# Altium PCB bai 2.PcbDoc
Units mil, origin at the board's own origin, x right, y up, seen from the top; angles counter-clockwise.
Board outline 4985 x 2990 mil, 2 copper layers (Top Layer, Bottom Layer); 15 components, 9 nets, 34 pads, 0 vias.
Unrouted connection lines stored in the file: 1.
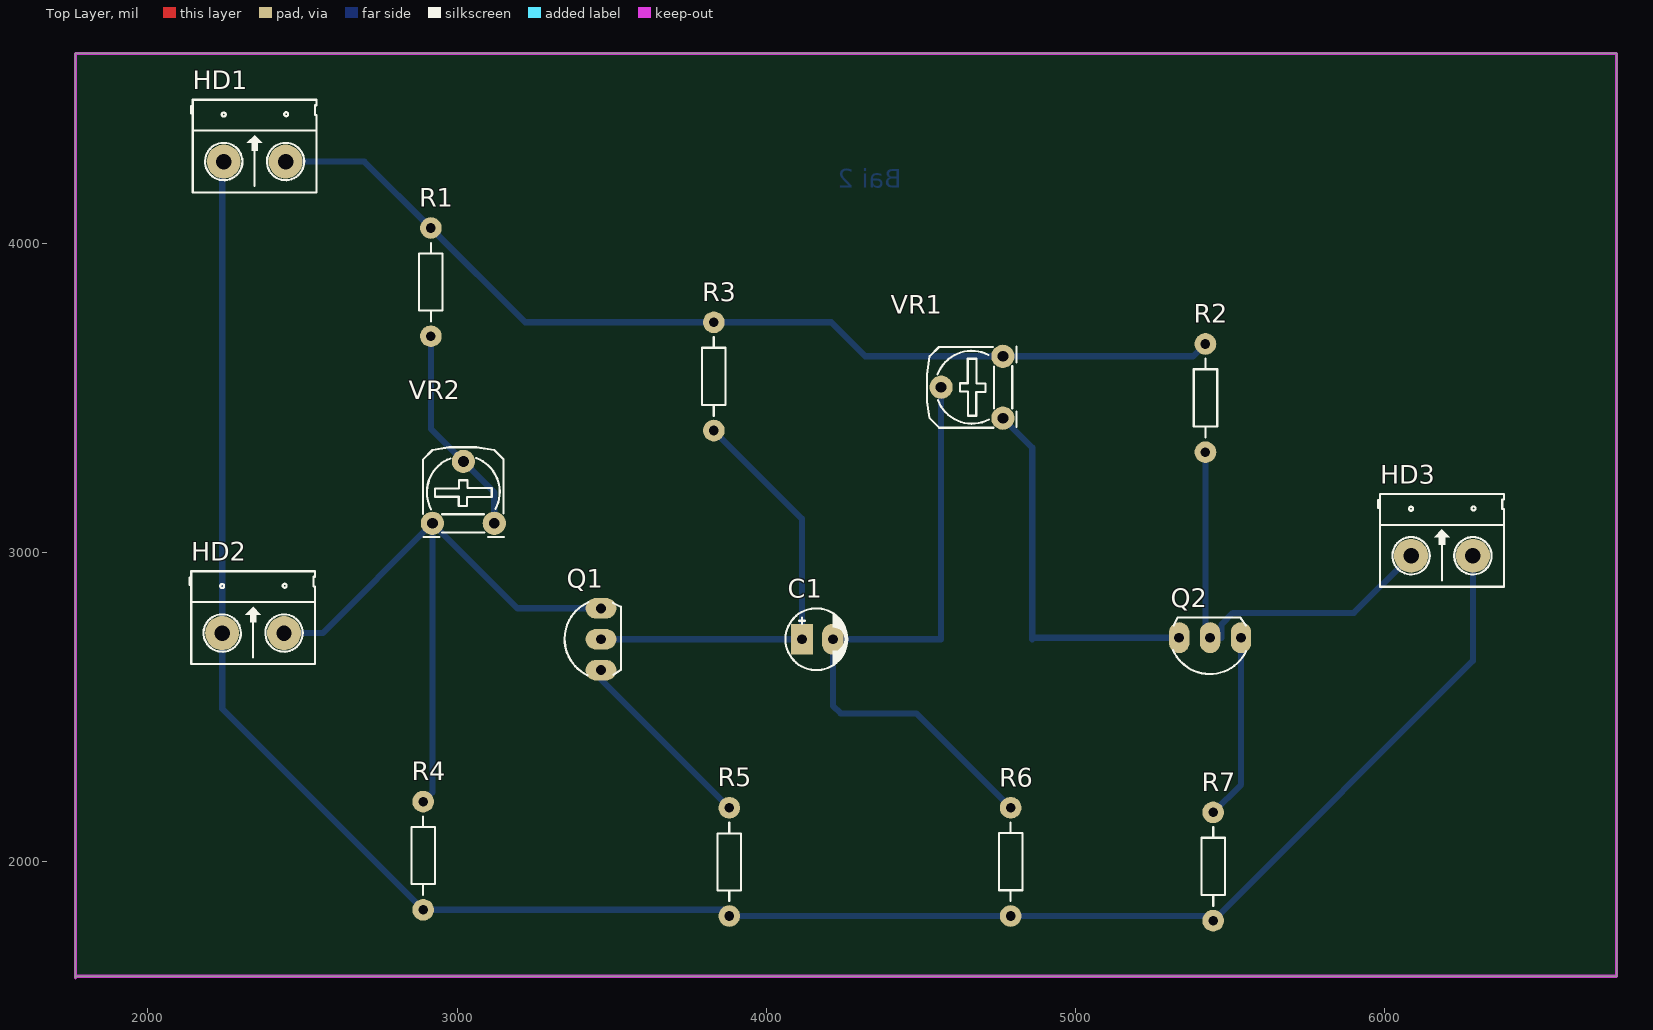
[diagram p0: Top Layer view]
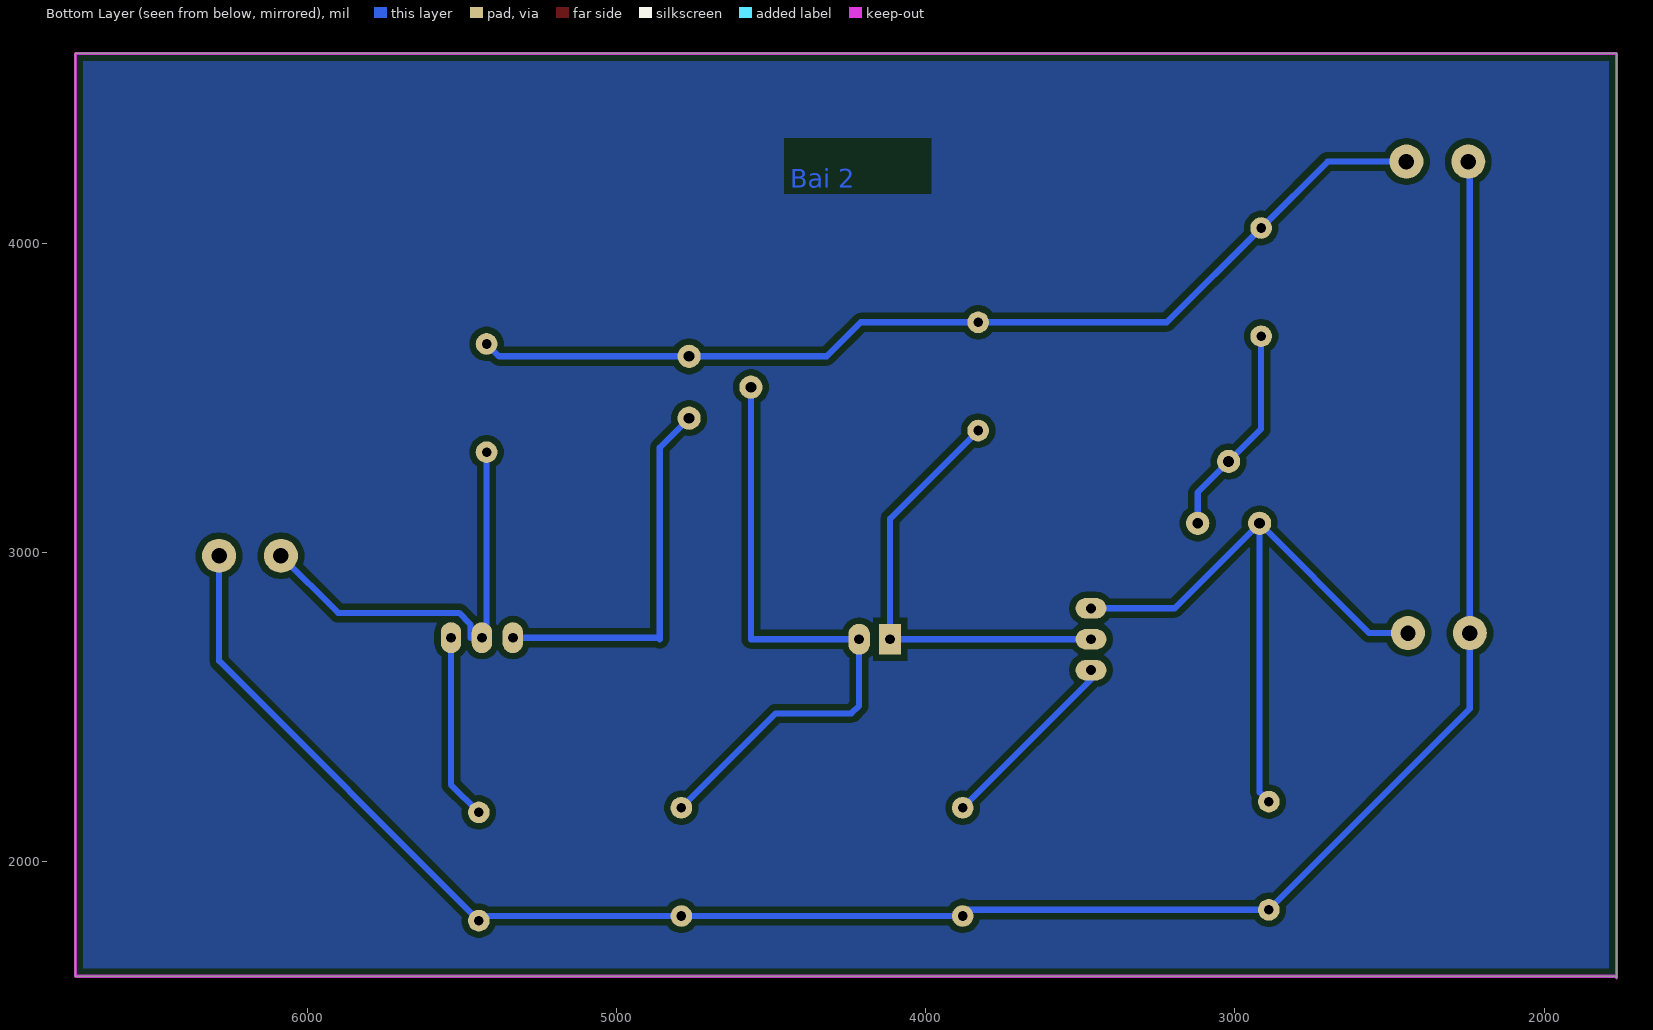
[diagram p1: Bottom Layer view, seen from below]
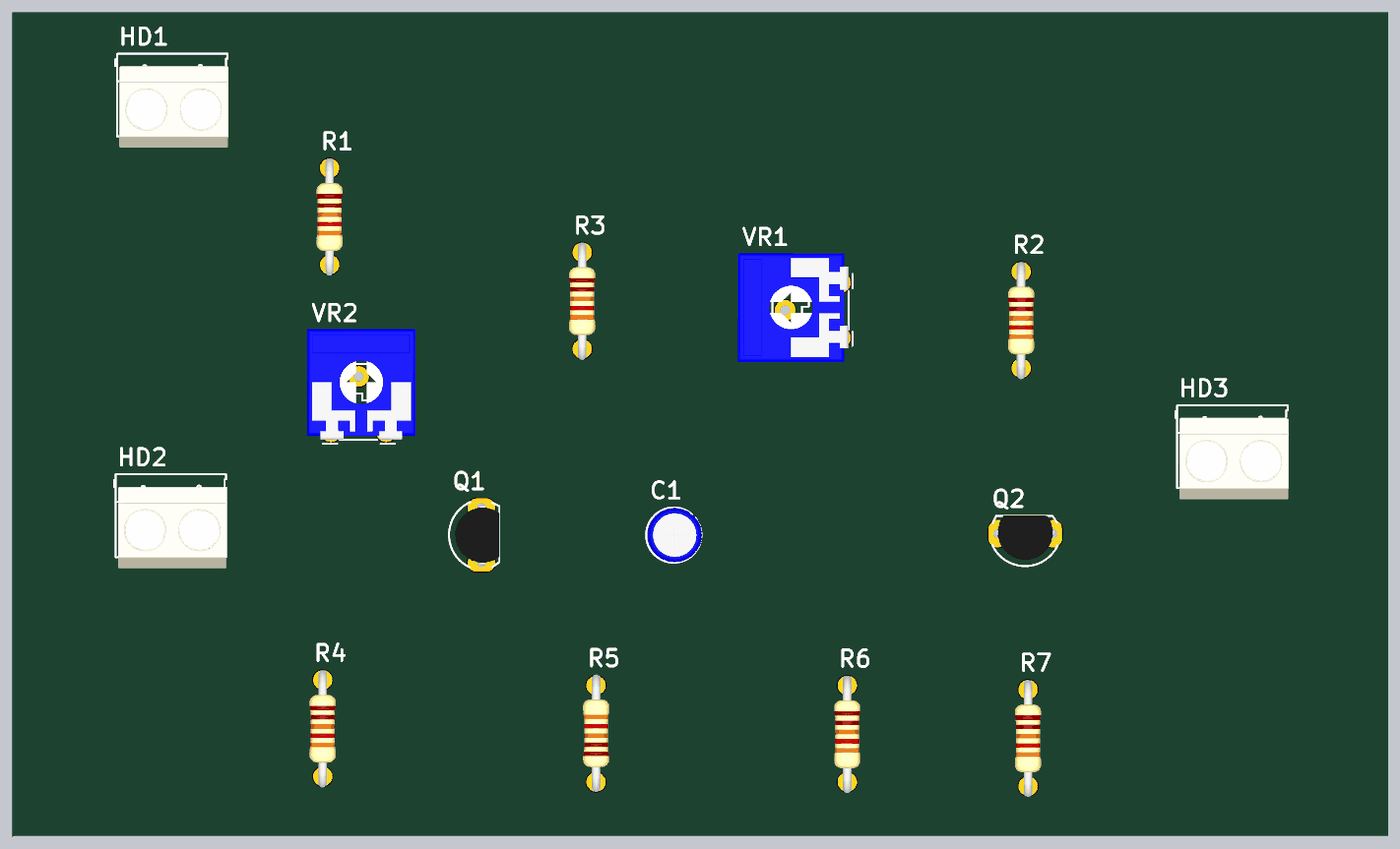
[diagram p2: 3D render of the assembled board from above, using the file's embedded part models]

## Layer stack, top to bottom
Top Solder: solder mask 0.4, Solder Resist, Dk 3.5
Top Layer: signal copper 1.4
Dielectric 1: dielectric 12.6, FR-4, Dk 4.8
Bottom Layer: signal copper 1.4
Bottom Solder: solder mask 0.4, Solder Resist, Dk 3.5

## Board outline
1765,1625 1770,1630 6750,1630 6750,4615 1765,4615

## Design rules (kind name [scope] priority, off if disabled: settings)
Clearance [All] p1: gap=20 ignorepadtopadclearanceinfootprint=FALSE
PolygonConnect [All] p1: connectstyle=Relief reliefconductorwidth=10 reliefentries=4 polygonreliefangle="90 Angle" airgapwidth=10
RoomDefinition "bai 2" [InComponentClass('bai 2')] p1: confinementstyle=ConfineIn formatcopy=TRUE lockcomponents=FALSE outline 7045,980 11360,980 11360,2800 7045,2800
RoutingLayers [All] p1: top layer_v5=FALSE bottom layer_v5=TRUE
RoutingVias [All] p1: holewidth=28 width=50 viastyle="Through Hole" minholewidth=28 minwidth=50 maxholewidth=28 maxwidth=50
SolderMaskExpansion [All] p1: expansion=4 istentingtop=FALSE
Width [All] p1: maxlimit=30 minlimit=15 preferedwidth=20
29 further rules are at their usual default settings.

## Components (designator, comment, footprint, x,y, rotation, side; value= is the part's Value field where it differs from the comment)
C1 "10uF" CP1/2 4115,2720 r0 top value=10uF/50V
HD1 "Header 2" HED2 2245,4265 r0 top
HD2 "Header 2" HED2 2240,2740 r0 top
HD3 "Header 2" HED2 6085,2990 r0 top
Q1 "C1815" QTO-92 3465,2720 r90 top
Q2 "C1815" QTO-92 5435,2725 r180 top
R1 "1k" R1/4W 2915,3700 r90 top value="R1/4W - 1K"
R2 "1k" R1/4W 5420,3325 r90 top value="R1/4W - 1K"
R3 "1k" R1/4W 3830,3395 r90 top value="R1/4W - 1K"
R4 "1k" R1/4W 2890,1845 r90 top value="R1/4W - 1K"
R5 "1k" R1/4W 3880,2175 r270 top value="R1/4W - 1K"
R6 "1k" R1/4W 4790,1825 r90 top value="R1/4W - 1K"
R7 "1k" R1/4W 5445,1810 r90 top value="R1/4W - 1K"
VR1 "10K" VR 4765,3435 r90 top value="VR 10K"
VR2 "10K" VR 2920,3095 r0 top value="VR 10K"

## Footprints (in the part's own frame and the unit in brackets; to place one, negate y for a bottom-side part, rotate by r counter-clockwise, add the part's x,y. Pads: shape width x height; smd on the part's side, far side on the other; paste and mask are expansions set on the pad)
CP1/2 [mil] "Tu hoa < 22uF/16>50V"
  rect 70x100 hole 32: 1(0,0)
  oval 70x100 hole 32: 2(100,0)
  silkscreen extent -53,-100 147,100, body extent -49,-99 149,99, height 287
HED2 [mil] "Header 2, 2 pin, hight 300mil, Pin to Pin 200, Colour Green"
  round 110 hole 50: 1(0,0) 2(200,0)
  silkscreen extent -106,-100 300,200, body extent -92,-140 302,155, height 394
QTO-92 [mil] "TO-92"
  oval 66x100 hole 32: 1(-100,0) 2(0,0) 3(100,0)
  silkscreen extent -117,-65 120,118, body extent -109,-66 109,95, height 245
R1/4W [mil] "R 1/4W, 2 Pin, 350mil"
  round 70 hole 31: 1(0,0) 2(350,0)
  silkscreen extent 48,-38 302,38, body extent -40,-47 386,47, height 111
VR [mil] "Resistor Variable"
  round 75 hole 35: 1(0,0) 2(100,200) 3(200,0)
  silkscreen extent -31,-44 231,246, body extent -87,-30 307,372, height 165

## Part data
C1: library part CP1, "Cap P  0,1uF < 22uF , 16 - 50V", Description 1="10 => 220uF/6,3V/10V - 10uF => 100uF/16V", Description 2="0,1uF => 33uF/50V - 10uF => 22uF/63V", Description 3="0,47uF => 10uF/100V"
HD1 HD2 HD3: library part Hed2, "Header 2 (Green)"
Q1 Q2: "NPN 600mW, ECB", =C2383
R1 R2 R3 R4 R5 R6 R7: library part R1/4W, "Resistor 1/4W"
VR1 VR2: library part VR1, "Var Resistor"

## Nets (pads, with @x,y where several pads share a name; then routed paths per layer and width w, separated by ;. In a path a pad name is that pad's centre, name@x,y a point inside that pad or via, vN(x,y) a via of type N, cw(c..) or ccw(c..) an arc to the next point about the centre after c; other vN are vias at no path point)
+12: HD1.2 R1.2 R2.2 R3.2 VR1.3 | length 3252.5
  Bottom Layer w20: HD1.2 2700,4265 R1.2 3220,3745 R3.2 4210,3745 4320,3635 VR1.3 5380,3635 R2.2
GND: HD1.1 HD2.1 HD3.2 R4.1 R5.2 R6.1 R7.1 | length 6788.7
  Bottom Layer w20: HD1.1 2240,4260 HD2.1 2240,2495 R4.1 3860,1845 R5.2 R6.1 5430,1825 R7.1 6285,2650 HD3.2
NetC1_1: C1.1 Q1.2 R3.1 | length 1443.1
  Bottom Layer w20: Q1.2 C1.1 4115,3110 R3.1
NetC1_2: C1.2 Q2.3 R6.2 VR1.1 VR1.2 | length 3323.1
  Bottom Layer w20: VR1.2 4565,2720 C1.2 4215,2505 4240,2480 4485,2480 R6.2 ; VR1.1 4860,3340 4860,2720 4865,2725 Q2.3
NetHD2_2: HD2.2 Q1.3 R4.2 VR2.1 | length 2198.4
  Bottom Layer w20: HD2.2 2565,2740 VR2.1 ; R4.2 2920,2225 VR2.1 ; Q1.3 3195,2820 VR2.1
NetHD3_1: HD3.1 Q2.2 R2.1 | length 1391.2
  Bottom Layer w20: R2.1 5420,2740 Q2.2 5472,2725 5472,2768.1 5508.9,2805 5900,2805 HD3.1
NetQ1_1: Q1.1 R5.1 | length 616.9
  Bottom Layer w20: Q1.1 3465,2590 R5.1
NetQ2_1: Q2.1 R7.2 | length 602.3
  Bottom Layer w20: R7.2 5535,2250 Q2.1
NetR1_1: R1.1 VR2.2 VR2.3 | length 689.9
  Bottom Layer w20: R1.1 2915,3400 VR2.2 3120,3195 VR2.3

## Polygon pours and split planes (outlines as drawn)
no net on Bottom Layer "NONET_L02_P000" (solid, pour order 0): 1765,4615 6745,4615 6745,1635 6750,1630 1765,1630

## Keep-outs
Keep-Out Layer:
  the board outline again, w10

## Other copper
Bottom Layer:
  text "Bai 2" at 4437.49,4180 h60